# Altium PCB Rain Module_v2_PCB.PcbDoc
Units mm, origin at the board's own origin, x right, y up, seen from the top; angles counter-clockwise.
Board outline 50 x 82.5 mm, 2 copper layers (Top Layer, Bottom Layer), stack 1.571 mm thick; 11 components, 7 nets, 32 pads, 3 vias.
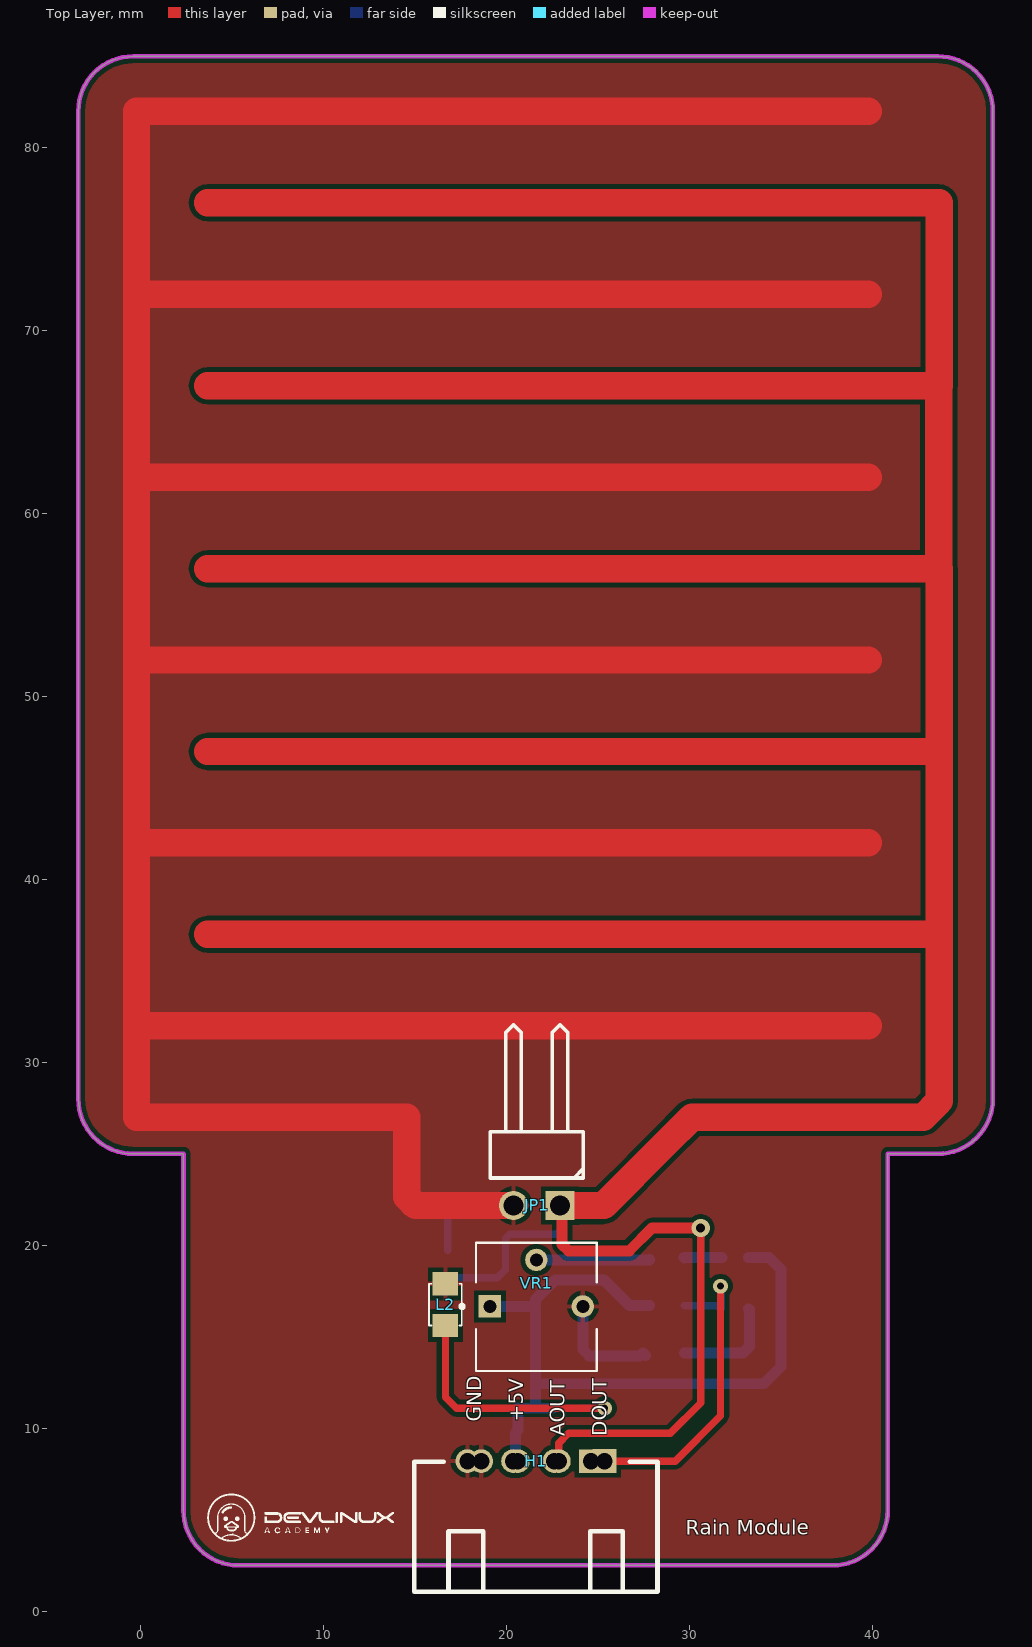
[diagram p0: Top Layer view]
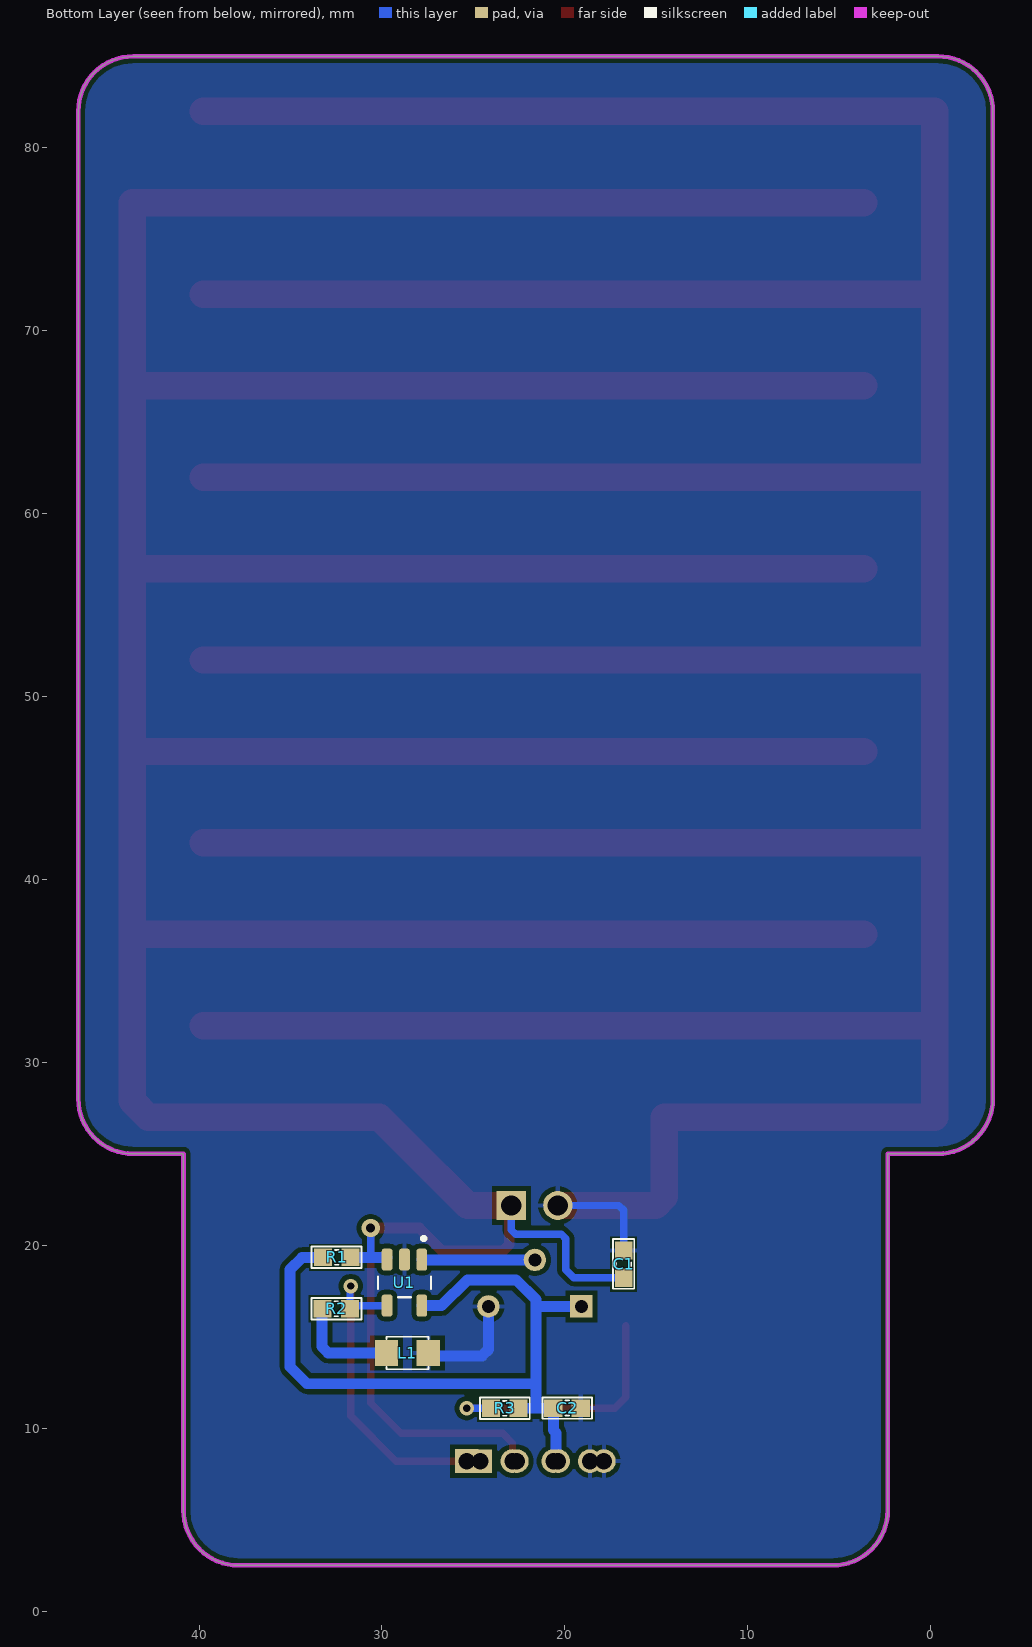
[diagram p1: Bottom Layer view, seen from below]
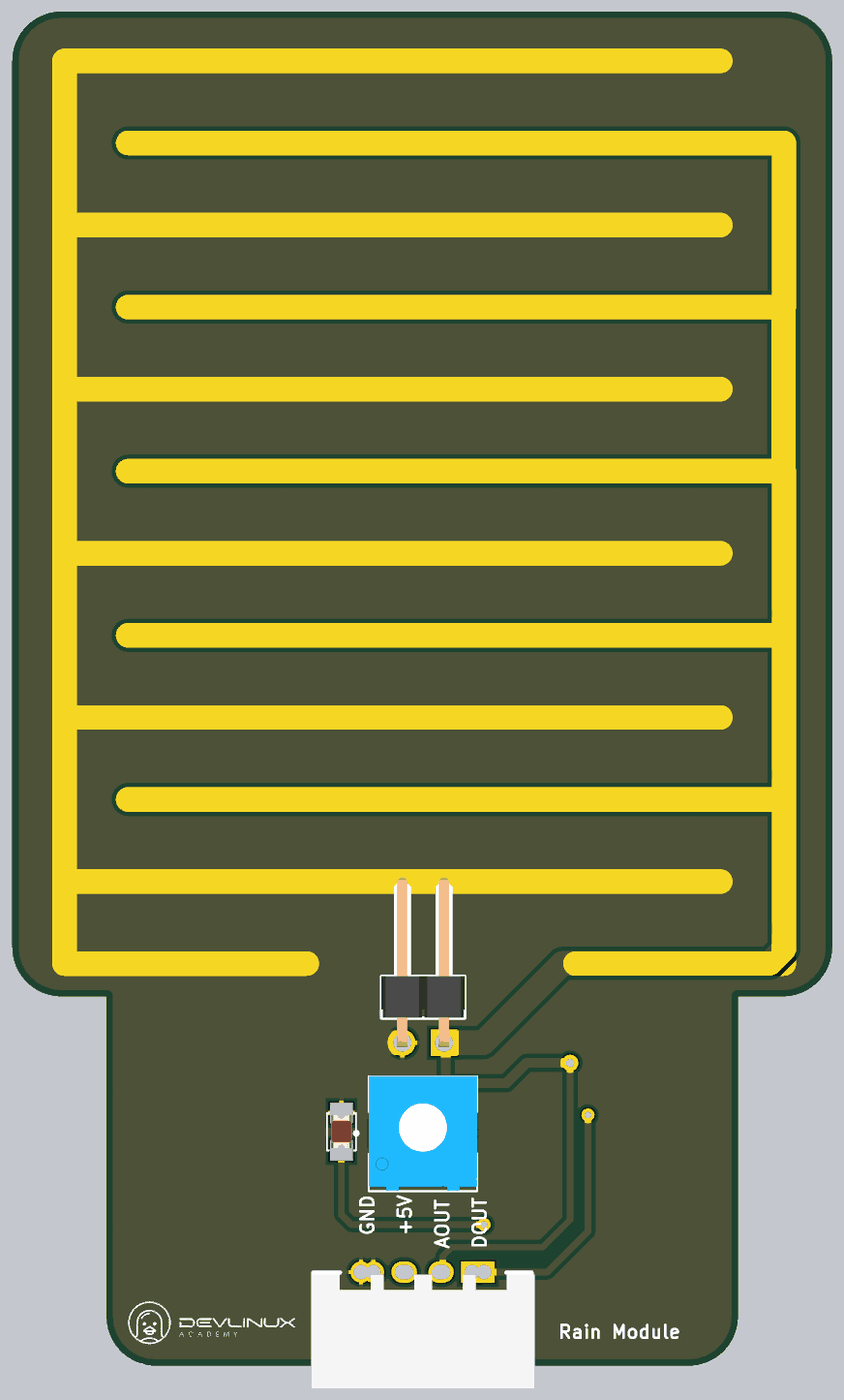
[diagram p2: 3D render of the assembled board from above, using the file's embedded part models]
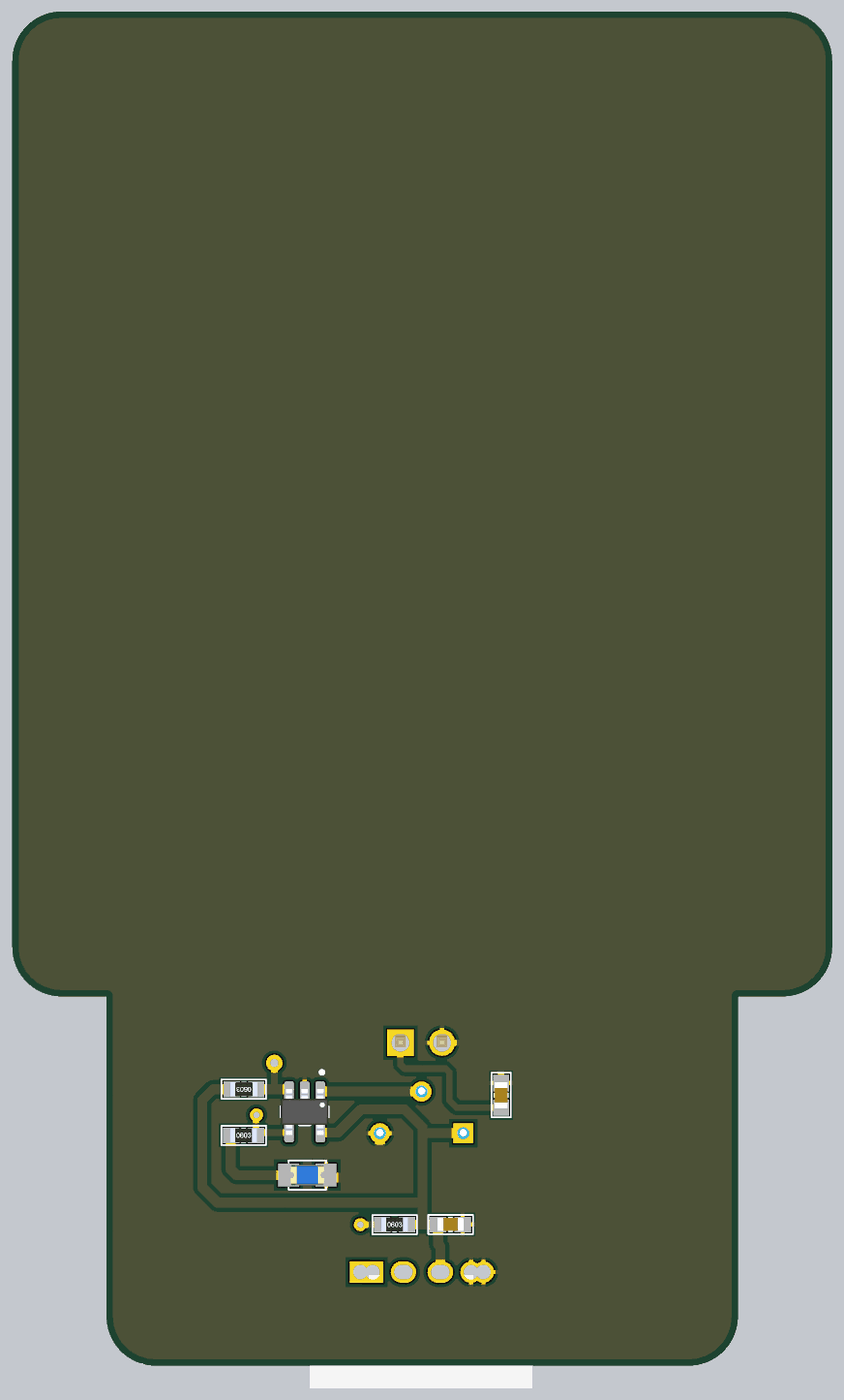
[diagram p3: 3D render of the assembled board from below, using the file's embedded part models]

## Layer stack, top to bottom
Top Solder: solder mask 0.0102, Solder Resist, Dk 3.5
Top Layer: signal copper 0.0356
Dielectric 1: dielectric 1.5, FR-4, Dk 4.8
Bottom Layer: signal copper 0.0356
Bottom Solder: solder mask 0.0102, Solder Resist, Dk 3.5

## Board outline
-3.4,28 ccw(c-0.4,28) -0.4,25 2.35,25 2.35,5.5 ccw(c5.35,5.5) 5.35,2.5 37.85,2.5 ccw(c37.85,5.5) 40.85,5.5 40.85,25 43.6,25 ccw(c43.6,28) 46.6,28 46.6,82 ccw(c43.6,82) 43.6,85 -0.4,85 ccw(c-0.4,82) -3.4,82

## Design rules (kind name [scope] priority, off if disabled: settings)
Clearance [All] p1: gap=0.254 ignorepadtopadclearanceinfootprint=FALSE except(0: Arc-Hole Track-Hole SMDPad-Hole THPad-Hole Via-Hole Fill-Hole Poly-Hole Region-Hole Text-Hole)
PolygonConnect [All] p1: connectstyle=Relief reliefconductorwidth=0.254 reliefentries=4 polygonreliefangle="90 Angle" airgapwidth=0.254
RoomDefinition "Rain Module_v2_SCH" [InComponentClass('Rain Module_v2_SCH')] p1: confinementstyle=ConfineIn formatcopy=TRUE lockcomponents=FALSE outline 41.732,-8.08 99.009,-8.08 99.009,10.081 41.732,10.081
RoutingVias [All] p1: holewidth=0.4 width=0.8 viastyle="Through Hole" minholewidth=0.3 minwidth=0.6 maxholewidth=0.5 maxwidth=1
SolderMaskExpansion [All] p1: expansion=0.102 istentingtop=FALSE
Width [All] p1: maxlimit=0.6 minlimit=0.254 preferedwidth=0.4
30 further rules are at their usual default settings.

## Components (designator, comment, footprint, x,y, rotation, side; value= is the part's Value field where it differs from the comment)
C1 "100nF" "tu 0603" 16.79,18.97 r90 bottom
C2 "100nF" "tu 0603" 19.88,11.1 r180 bottom
H1 "Header 4P 2.54 + 2.0 Duc Cong" "Header 4P DC 2.54 + 2.0" 25.345,8.175 r270 top
JP1 "JP 1x2 2.54" "JP 1x2 DC" 22.929,22.176 r180 top
L1 "LED BLUE" LED-0805-Blue 29.75,14.11 r180 bottom
L2 "LED RED" LED-0805-Red 16.67,15.61 r90 top
R1 "10k" "tro smd 0603" 32.475,19.34 r0 bottom
R2 "1k" "tro smd 0603" 32.5,16.53 r180 bottom
R3 "1k" "tro smd 0603" 23.29,11.09 r180 bottom
U1 "LM321MF" SOT95P280X145-5N 28.77,17.96 r270 bottom
VR1 "10k" TRIM_3362P-1-102 21.64,16.66 r0 top

## Footprints (in the part's own frame and the unit in brackets; to place one, negate y for a bottom-side part, rotate by r counter-clockwise, add the part's x,y. Pads: shape width x height; smd on the part's side, far side on the other; paste and mask are expansions set on the pad)
"Header 4P DC 2.54 + 2.0" [mm]
  rect 1.3x1.3 hole 0.889: 1(-0.025,0.025) 1(-0.022,-0.719)
  round 1.3 hole 0.889: 2(-0.025,-2.475) 2(-0.022,-2.719) 3(-0.025,-4.975) 3(-0.022,-4.719) 4(-0.025,-7.475) 4(-0.022,-6.718)
  silkscreen extent 0,-10.39 7.11,2.92, body extent 0.13,-10.48 7.06,3.11, height 7.38
"JP 1x2 DC" [mm] "JP 1x2 DC"
  rect 1.6x1.6 hole 1.1: 1(0,0)
  round 1.6 hole 1.1: 2(2.54,0)
  silkscreen extent -1.27,-9.88 3.81,-1.5, body extent -1.27,-10.06 3.81,0.3, height 2.55
LED-0805-Blue [mil]
  rect 50x55 smd: 1(0,0) 2(90,0)
  silkscreen extent 0,-35 90,35, body extent 5,-25 85,25, height 43
LED-0805-Red [mil]
  rect 50x55 smd: 1(0,0) 2(90,0)
  silkscreen extent 0,-35 90,35, body extent 5,-25 85,25, height 43
SOT95P280X145-5N [mm]
  rrect50% 1.21x0.59 smd: 1(-1.255,0.95) 2(-1.255,0) 3(-1.255,-0.95) 4(1.255,-0.95) 5(1.255,0.95)
  silkscreen extent -2.51,-1.45 0.8,1.45, body extent -1.4,-1.45 1.4,1.45, height 1.45
TRIM_3362P-1-102 [mm]
  rect 1.222x1.222 / inner round 1.222 / far side rect 1.222x1.222 hole 0.714: 1(-2.54,0)
  round 1.222 hole 0.714: 2(0,2.54) 3(2.54,0)
  silkscreen extent -4.16,-3.53 3.3,3.47, body extent -3.3,-3.5 3.3,3.49, height 4.88
"tro smd 0603" [mm] "Chip Capacitor, 2-Leads, Body 1,60x0,80mm, IPC Medium Density"
  rect 1x0.95 smd mask+0.076: 1(-0.75,0) 2(0.75,0)
  silkscreen extent -1.35,-0.58 1.37,0.58, body extent -0.82,-0.42 0.82,0.43, height 0.44
"tu 0603" [mm] "Chip Capacitor, 2-Leads, Body 1,60x0,80mm, IPC Medium Density"
  rect 1x0.95 smd mask+0.076: 1(-0.75,0) 2(0.75,0)
  silkscreen extent -1.35,-0.58 1.37,0.58, body extent -0.8,-0.4 0.8,0.4, height 0.9

## Part data
C1 C2: library part "Tu 0603 104 50V 10%", "Dán", Chung_Loai=Dán, Don_Vi=Con, Ma_Hang=MH004568, So_Chan=2, Ten_Linh_Kien="Tụ 0603 104-100nF 10% 50V"
H1: "Cắm", Chung_Loai=Cắm, Don_Vi=Con, Ma_Hang=MH001310, Ten_Linh_Kien="Header 4P XH2.54-4P Đực Cong"
JP1: library part "JP 1x2 2.54 Duc Cong", "Cắm", Chung_Loai=Cắm, Don_Vi=Con, Ma_Hang=MH000904, Ten_Linh_Kien="Jump Đơn Đực 2.54MM 1x40P Cong Đứng"
L1: library part "LED 0805 Xanh Duong", "Dán", Chung_Loai=Dán, Don_Vi=Con, Ma_Hang=MH002327, Ten_Linh_Kien="LED 0805 Màu Xanh Dương (Blue)"
L2: library part "LED 0805 Do", "Dán", Chung_Loai=Dán, Don_Vi=Con, Ma_Hang=MH000897, Ten_Linh_Kien="LED 0805 Màu Đỏ (Red)"
R1: library part "Tro 0603 1% 10k", "Dán", Chung_Loai=Dán, Don_Vi=Con, Ma_Hang=MH006333, So_Chan=2, Ten_Linh_Kien="Trở 0603 1% 10k"
R2 R3: library part "Tro 0603 1% 1k", "Dán", Chung_Loai=Dán, Don_Vi=Con, Ma_Hang=MH006334, So_Chan=2, Ten_Linh_Kien="Trở 0603 1% 1k"
U1: "Low Power Single Op Amp 5-SOT-23 -40 to 85", Package="SOT-23-5 Texas Instruments", Check_prices=https://www.snapeda.com/parts/LM321MF/Texas+Instruments/view-part/?ref=eda, MF="Texas Instruments", MP=LM321MF, SnapEDA_Link=https://www.snapeda.com/parts/LM321MF/Texas+Instruments/view-part/?ref=snap
VR1: library part "Bien tro vuong", "TRIMMER - 1/4in SQ ST CERMET", Package="3362P-1 Bourns Inc.", Check_prices=https://www.snapeda.com/parts/3362P-1-102/Bourns/view-part/?ref=eda, MF=Bourns, MP=3362P-1-102, SnapEDA_Link=https://www.snapeda.com/parts/3362P-1-102/Bourns/view-part/?ref=snap

## Via types
v1: diameter 0.8, hole 0.4, Top Layer to Bottom Layer, 2 vias
v2: diameter 1, hole 0.5, Top Layer to Bottom Layer, 1 vias

## Nets (pads, with @x,y where several pads share a name; then routed paths per layer and width w, separated by ;. In a path a pad name is that pad's centre, name@x,y a point inside that pad or via, vN(x,y) a via of type N, cw(c..) or ccw(c..) an arc to the next point about the centre after c; other vN are vias at no path point)
+5: C2.1 H1.3 R1.2 R3.2 U1.5 VR1.1 | length 41.8
  Bottom Layer w0.6: VR1.1 21.585,16.66 ; H1.3@20.37,8.2 20.49,8.32 20.49,9.75 20.63,9.89 C2.1 20.83,11.091 21.585,11.091 ; R3.2 22.34,11.091 21.585,11.091 ; U1.5 26.736,16.705 25.331,18.11 22.66,18.11 21.585,17.035 21.585,16.66 ; R1.2 34.36,19.34 35.02,18.68 35.02,13.36 34.09,12.43 21.585,12.43 ; 21.585,11.091 21.585,12.43 ; 21.585,12.43 21.585,16.66
A_OUT: C1.1 H1.2 JP1.1 R1.1 U1.3 | length 315.5
  Top Layer w0.4: H1.2@22.626,8.197 22.859,8.43 22.859,9.179 23.4,9.72 28.96,9.72 30.62,11.38 v2(30.62,20.94)
  Top Layer w0.6: JP1.1 23.041,22.064 23.041,20.051 23.393,19.7 26.72,19.7 27.96,20.94 v2(30.62,20.94) ; 25.316,22.176 25.432,22.06
  Top Layer w1.5: 3.662,36.996 43.662,36.996 ; 3.662,46.996 43.662,46.996 ; 3.662,56.996 43.662,56.996 ; 3.662,66.996 43.662,66.996 ; 3.662,76.996 43.662,76.996 43.662,66.996 ; JP1.1 25.316,22.176 28.66,25.52 30.15,27.01 42.783,27.01 43.662,27.889 43.662,36.996 ; 43.622,57.036 43.662,56.996 ; 43.642,57.016 43.642,66.976 43.662,66.996 ; 43.662,36.996 43.662,46.996 ; 43.662,46.996 43.662,56.996
  Bottom Layer w0.4: C1.1 19.51,18.22 19.95,18.66 19.95,20.366 20.184,20.6 22.695,20.6 22.929,20.834 JP1.1 ; U1.3 U1.3@29.72,19.335 ; 30.62,19.34 v2(30.62,20.94)
  Bottom Layer w0.6: U1.3@29.72,19.335 29.725,19.34 30.62,19.34 R1.1 R1.1@31.8,19.34
D_OUT: H1.1 R2.2 U1.4 | length 17.8
  Top Layer w0.4: H1.1@25.37,8.2 29.23,8.2 31.71,10.68 v1(31.71,17.77)
  Bottom Layer w0.4: U1.4 29.815,16.697 31.45,16.697 R2.2 31.75,17.73 v1(31.71,17.77)
GND: C1.2 C2.2 H1.4 JP1.2 L1.2 L2.2 U1.2 VR1.3 | length 332.2
  Top Layer w1.5: JP1.2 15.034,22.176 14.559,22.651 14.559,26.996 -0.22,26.996 -0.22,31.996 ; 39.78,31.996 -0.22,31.996 ; 39.78,41.996 -0.22,41.996 ; 39.78,51.996 -0.22,51.996 ; 39.78,61.996 -0.22,61.996 ; 39.78,71.996 -0.22,71.996 ; 39.78,81.996 -0.22,81.996 -0.22,71.996 ; -0.22,31.996 -0.22,41.996 ; -0.22,41.996 -0.22,51.996 ; -0.22,51.996 -0.22,61.996 ; -0.22,61.996 -0.22,71.996
  Bottom Layer w0.4: C1.2 16.79,21.91 17.056,22.176 JP1.2
  Bottom Layer w0.6: H1.4@18.626,8.197 H1.4@18.693,8.264 ; VR1.3 24.18,14.311 24.531,13.96 27.314,13.96 L1.2 L1.2@27.61,13.964
NetL1_1: L1.1 R2.1 | length 5.8
  Bottom Layer w0.6: L1.1 32.939,14.11 33.29,14.461 33.29,16.49 R2.1
NetL2_1: L2.1 R3.1 | length 14.2
  Top Layer w0.4: L2.1 16.67,11.69 17.27,11.09 v1(25.37,11.09)
  Bottom Layer w0.4: R3.1 v1(25.37,11.09)
NetU1_1: U1.1 VR1.2 | length 9.2
  Bottom Layer w0.6: 24.62,19.2 VR1.2 21.647,19.208 24.62,19.208 27.815,19.208 27.82,19.212 U1.1

## Polygon pours and split planes (outlines as drawn)
GND on Top Layer "NONET_L-01_P-001" (solid, remove dead copper, pour order 10): -10.641,92.686 55.199,92.686 58.629,89.256 58.629,-7.704 -9.651,-7.704 -13.081,-11.134
GND on Top Layer "NONET_L-01_P-001" (solid, remove dead copper, pour order 6): 12.349,24.996 30.849,24.996 30.849,-2.994 12.349,-2.994
GND on Bottom Layer "NONET_L-01_P-001" (solid, remove dead copper, pour order 9): -13.031,88.476 -12.301,87.746 54.309,87.746 54.309,-4.344 54.669,-4.704 52.849,-6.524 -12.791,-6.524

## Keep-outs
Keep-Out Layer:
  the board outline again, w0.254

## Silkscreen, mask and mechanical layers (free items; w line width, h text height)
Top Overlay:
  drawing of 21 lines, arcs and shapes, not listed
  text "GND" at 18.63,10.35 h0.8 r90
  text "+5V" at 20.913,10.35 h0.8 r90
  text "AOUT" at 23.197,9.55 h0.8 r90
  text "DOUT" at 25.48,9.55 h0.8 r90
  text "Rain Module" at 29.81,4.18 h0.8
Top Solder:
  lines w1.5: 3.652,36.996 43.652,36.996 ; 3.652,46.996 43.652,46.996 ; 3.652,56.996 43.652,56.996 ; 3.652,66.996 43.652,66.996 ; 3.652,76.996 43.652,76.996 43.652,66.996 ; 14.559,26.996 -0.22,26.996 -0.22,31.996 ; 30.95,26.996 43.652,26.996 43.652,36.996 ; 39.78,31.996 -0.22,31.996 ; 39.78,41.996 -0.22,41.996 ; 39.78,51.996 -0.22,51.996 ; 39.78,61.996 -0.22,61.996 ; 39.78,71.996 -0.22,71.996 ; 39.78,81.996 -0.22,81.996 -0.22,71.996 ; 43.612,57.036 43.652,56.996 ; 43.632,57.016 43.632,66.976 43.652,66.996 ; -0.22,31.996 -0.22,41.996 ; -0.22,31.996 -0.22,31.996 ; -0.22,41.996 -0.22,51.996 ; -0.22,51.996 -0.22,61.996 ; -0.22,61.996 -0.22,71.996 ; 43.652,36.996 43.652,46.996 ; 43.652,46.996 43.652,56.996